# Altium PCB sensornode_poc_rtc.PcbDoc
Units mm, origin at the board's own origin, x right, y up, seen from the top; angles counter-clockwise.
Board outline 55 x 50 mm, 2 copper layers (Top Layer, Bottom Layer); 25 components, 28 nets, 102 pads, 18 vias.
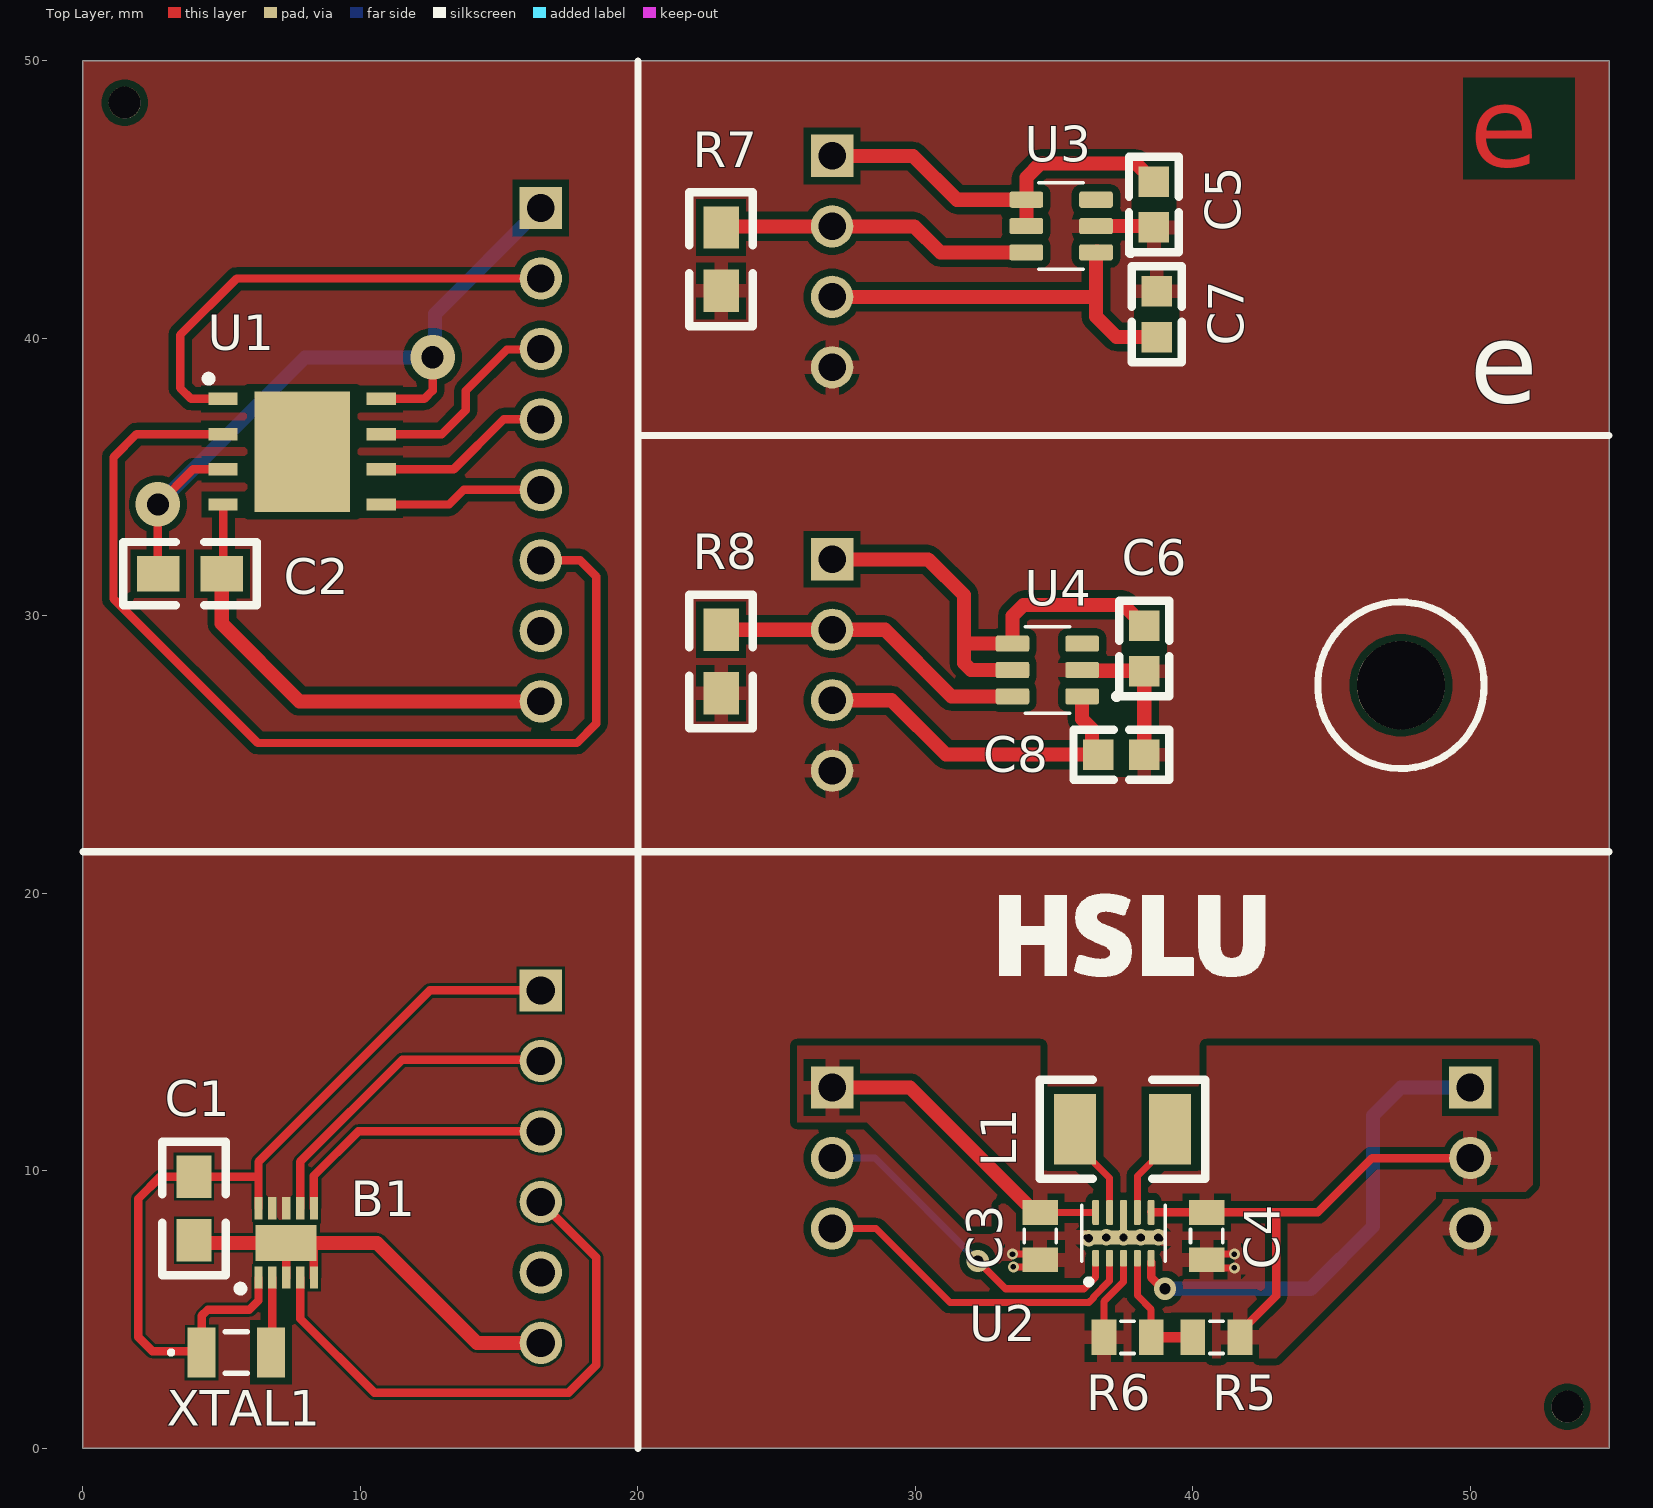
[diagram p0: Top Layer view]
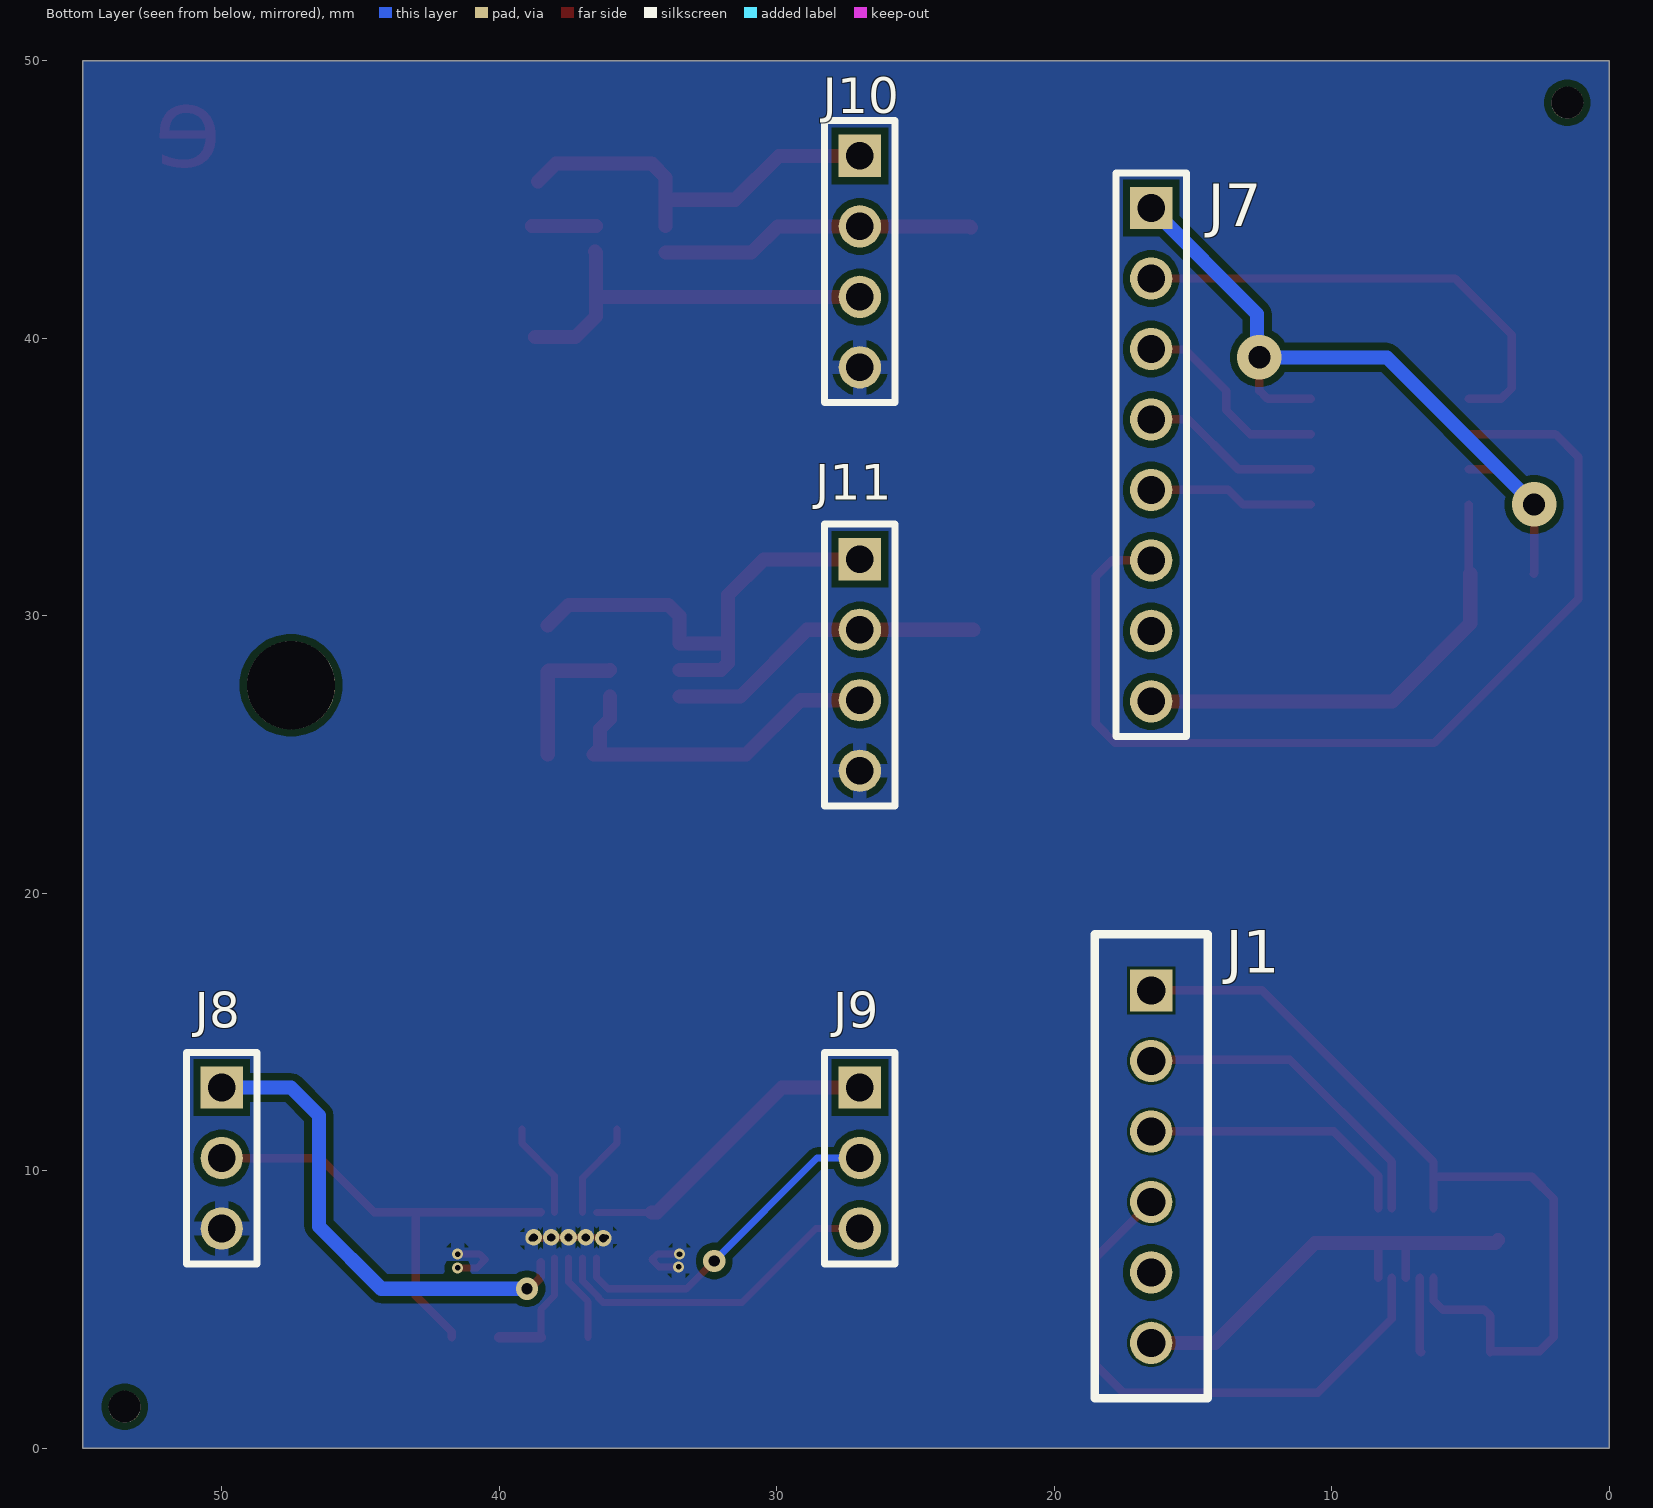
[diagram p1: Bottom Layer view, seen from below]

## Layer stack, top to bottom
Top Solder: solder mask 0.0102, Solder Resist, Dk 3.5
Top Layer: signal copper 0.0356
Dielectric 1: dielectric 0.32, FR-4, Dk 4.8
Bottom Layer: signal copper 0.0356
Bottom Solder: solder mask 0.0102, Solder Resist, Dk 3.5

## Board outline
0,50 0,0 55,0 55,50

## Design rules (kind name [scope] priority, off if disabled: settings)
Clearance Clearance_RTC_NET [All vs InNet('RTC_*')] p1: gap=0.1 ignorepadtopadclearanceinfootprint=FALSE
Clearance Clearance_VREG_NET [All vs InNet('RTC_*')] p2: gap=0.1 ignorepadtopadclearanceinfootprint=FALSE
Clearance Clearance_RTC [HasFootprint('SON50P260X260X50-11N')] p3: gap=0 ignorepadtopadclearanceinfootprint=FALSE
Clearance Clearance_VREG [HasFootprint('VREG_TPS63802DLAR')] p4: gap=0 ignorepadtopadclearanceinfootprint=FALSE
Clearance Clearance_jlcpcb [All] p5: gap=0.254 ignorepadtopadclearanceinfootprint=TRUE except(0.127: Arc-Arc Arc-Track Track-Track SMDPad-SMDPad; 0.33: Arc-THPad Track-THPad; 0.5: THPad-THPad) // https://jlcpcb.com/capabilities/pcb-capabilities
PlaneConnect [All] p1: planeconnectstyle=Relief reliefexpansion=0.508 reliefentries=4 reliefconductorwidth=0.508 reliefairgap=0.254
PolygonConnect [All] p1: connectstyle=Relief reliefconductorwidth=0.508 reliefentries=4 polygonreliefangle="90 Angle" airgapwidth=0.254
RoutingVias [All] p1: holewidth=0.711 width=1.27 viastyle="Through Hole" minholewidth=0.711 minwidth=1.27 maxholewidth=0.711 maxwidth=1.27
SolderMaskExpansion SolderMaskExpansion_Via [IsVia] p1: expansion=0.102 istentingtop=TRUE
SolderMaskExpansion [All] p2: expansion=0.102 istentingtop=FALSE
Width Width_jlcpcb [All] p1: maxlimit=1.27 minlimit=0.127 preferedwidth=0.254 minimp=50.000000 maximp=50.000000 favimp=50.000000
29 further rules are at their usual default settings.

## Classes and differential pairs
net class POWER: GND NetL1_1 NetL1_2 NetR5_2 V_EXT V_POWER_GOOD VCC1 VCC1_EN VCC1_MODE
component class power: C3 C4 C5 C6 C7 C8 J8 J9 J10 J11 L1 R5 R6 R7 R8 U2 U3 U4
component class sensornode_poc_rtc: B1 C1 C2 J1 J7 U1 XTAL1

## Components (designator, comment, footprint, x,y, rotation, side; value= is the part's Value field where it differs from the comment)
B1 "PCF85063ATL_1_118" SON50P260X260X50-11N 7.325,7.404 r90 top
C1 "0.1u" 0805 4,9.786 r270 top
C2 "0.1u" 0805 2.714,31.52 r0 top
C3 "Capacitor 0402" 0805_S 34.5,6.798 r90 top value=10uF
C4 "Capacitor 0402" 0805_S 40.5,6.798 r90 top value=22uF
C5 "Capacitor 0402" 0603 38.6,44 r90 top value=1µF
C6 "Capacitor 0402" 0603 38.25,28 r90 top value=1µF
C7 "Capacitor 0402" 0603 38.7,41.7 r270 top value=0.1uF
C8 "Capacitor 0402" 0603 38.25,25 r180 top value=0.1uF
J1 "CON6" CON_1x6_RM2.54_tht 16.5,16.5 r180 bottom
J7 "CON8" HEADER_8_RM_2.54 16.5,44.7 r180 bottom
J8 "CON3" HEADER_3_RM_2.54 50,13 r180 bottom
J9 "CON3" HEADER_3_RM_2.54 27,13 r180 bottom
J10 "CON4" HEADER_4_RM_2.54 27,46.58 r180 bottom
J11 "CON4" HEADER_4_RM_2.54 27,32.04 r180 bottom
L1 "0.47uH" 1210 35.75,11.5 r0 top
R5 "511k" 0805_S 41.702,4 r180 top
R6 "91k" 0805_S 38.5,4 r180 top
R7 "100k" 0805 23,44 r270 top
R8 "100k" 0805 23,29.5 r270 top
U1 "MEM_W25Q128FV" SON127P600X500X80-9N-D 7.9,35.92 r0 top
U2 "TPS63802DLAR" VREG_TPS63802DLAR 37.5,7.75 r90 top
U3 "TPS22860DBVR" SOT95P280X145-6N 35.255,44.05 r180 top
U4 "TPS22860DBVR" SOT95P280X145-6N 34.755,28.05 r180 top
XTAL1 "SC32S" SC32S7PF20PPM 5.525,3.454 r0 top

## Footprints (in the part's own frame and the unit in brackets; to place one, negate y for a bottom-side part, rotate by r counter-clockwise, add the part's x,y. Pads: shape width x height; smd on the part's side, far side on the other; paste and mask are expansions set on the pad)
0603 [mm]
  rect 1.1x1.1 smd: 1(0,0) 2(1.65,0)
  silkscreen extent -0.9,-0.9 2.55,0.9, body extent -0.45,-0.43 2.1,0.43, height 0.45
0805 [mil]
  rect 60x50 smd: 1(0,0) 2(90,0)
  silkscreen extent -50,-45 140,45, body extent 5,-25 85,25, height 51
0805_S [mil]
  rect 35x50 smd: 1(0,0) 2(67,0)
  silkscreen extent 24,-23 43,23, body extent -7,-25 74,25, height 44
1210 [mil]
  rect 60x100 smd: 1(0,0) 2(135,0)
  silkscreen extent -50,-70 185,70, body extent 4,-49 131,49, height 51
CON_1x6_RM2.54_tht [mil]
  rect 60x60 hole 40: 1(0,0)
  round 60 hole 40: 2(0,-100) 3(0,-200) 4(0,-300) 5(0,-400) 6(0,-500)
  silkscreen extent -80,-579 80,80
HEADER_3_RM_2.54 [mil] "Header 3 Pin 2.54mm"
  rect 60x60 hole 39.37: 1(0,0)
  round 60 hole 39.37: 2(0,-100) 3(0,-200)
  silkscreen extent -50,-250 50,50, body extent -50,-250 50,50, height 394
HEADER_4_RM_2.54 [mil] "Header 4 Pin 2.54mm"
  rect 60x60 hole 39.37: 1(0,0)
  round 60 hole 39.37: 2(0,-100) 3(-0.01,-200.01) 4(0,-300)
  silkscreen extent -50,-350 50,50, body extent -50,-350 50,50, height 394
HEADER_8_RM_2.54 [mil] "Header 8 Pin 2.54mm"
  rect 60x60 hole 39.37: 1(0,0)
  round 60 hole 39.37: 2(0,-100) 3(-0.01,-200.01) 4(0,-300) 5(0,-400) 6(0,-500) 7(0,-600) 8(0,-700)
  silkscreen extent -50,-750 50,50, body extent -50,-750 50,50, height 394
SC32S7PF20PPM [mm]
  rect 1x1.8 smd: 1(-1.25,0) 2(1.25,0)
  silkscreen extent -2.4,-0.75 0.4,0.75, body extent -1.65,-0.8 1.65,0.8, height 0.84
SON50P260X260X50-11N [mm]
  rect 0.8x0.3 smd: 1(-1.25,1) 2(-1.25,0.5) 3(-1.25,0) 4(-1.25,-0.5) 5(-1.25,-1) 6(1.25,-1) 7(1.25,-0.5) 8(1.25,0) 9(1.25,0.5) 10(1.25,1)
  rect 1.3x2.2 smd: 11(0,0)
  silkscreen extent -1.77,1.52 -1.53,1.77, body extent -1.25,-1.25 1.25,1.25, height 0.8
SON127P600X500X80-9N-D [mm]
  rect 1.05x0.45 smd: 1(-2.85,1.905) 2(-2.85,0.635) 3(-2.85,-0.635) 4(-2.85,-1.905) 5(2.85,-1.905) 6(2.85,-0.635) 7(2.85,0.635) 8(2.85,1.905)
  rect 3.45x4.35 smd: 9(0,0)
  silkscreen extent -3.5,2.51 -3.25,2.75, body extent -3.05,-2.5 3.05,2.5, height 0.8
SOT95P280X145-6N [mm]
  rrect25% 1.21x0.58 smd: 1(-1.255,0.95) 2(-1.255,0) 3(-1.255,-0.95) 4(1.255,-0.95) 5(1.255,0) 6(1.255,0.95)
  silkscreen extent -2.6,-1.56 0.8,1.56, body extent -1.35,-1.45 1.35,1.45, height 1.45
VREG_TPS63802DLAR [mm]
  rrect40% 0.6x0.25 smd mask+0: 1(-0.9,1) 2(-0.9,0.5) 3(-0.9,0) 4(-0.9,-0.5) 5(-0.9,-1)
  rrect40% 0.9x0.25 smd mask+0: 6(0.75,-1) 7(0.75,-0.5) 9(0.75,0.5) 10(0.75,1)
  rrect12% 0.5x3 smd paste-2 mask+0.05: 8(-0.15,0)
  rrect40% 1.3x0.25 smd paste-2 mask+0: 8(0.55,0)
  silkscreen extent -1.85,-1.5 1,1.5, body extent -1,-1.5 1,1.5, height 1

## Part data
B1: "NXP - PCF85063ATL/1,118 - REAL TIME CLOCK/CALENDAR, BINARY, HXSON", Manufacturer_Name=NXP, Manufacturer_Part_Number=PCF85063ATL/1,118, Mouser Part Number=771-PCF85063ATL1118, Datasheet Link=http://www.nxp.com/docs/en/data-sheet/PCF85063A.pdf, Geometry.Height=0.5mm, Mouser Price/Stock=https://www.mouser.co.uk/ProductDetail/NXP-Semiconductors/PCF85063ATL-1118?qs=fi7yB2oewZkLUjzuQ0vPOQ%3D%3D
C1 C2: library part C
C3 C4 C5 C6 C7 C8: library part C, Capacitor Type=Ceramic, Case/Package=0402, Manufacturer=TDK, Manufacturer Part Number=C1005X6S0J105K050BC, Max Operating Temperature=85°C, Min Operating Temperature=-55°C, Tolerance=10%, Voltage Rating=6.3V, Component Type=Capacitors, Mounting Technology=SM, Pins=2, RoHS Compliant=True
L1: library part L?, Supplier Part Number=81-1276AS-H-R47MP2, Supplier=Mouser, Supplier 1=Mouser, Supplier Part Number 1=81-1276AS-H-R47MP2
R5 R7 R8: library part R?, "Normaler Widerstand"
R6: library part R?, "Normaler Widerstand", Supplier Part Number=595-TPS63802DLAR, Supplier=Mouser
U1: library part MEMORY_W25Q128FV
U2: Package="WFDFN-10 Richtek", Check_prices=https://www.snapeda.com/parts/RT6150B-33GQW/Richtek+USA+Inc./view-part/?ref=eda, MF="Richtek USA", MP=RT6150B-33GQW, SnapEDA_Link=https://www.snapeda.com/parts/RT6150B-33GQW/Richtek+USA+Inc./view-part/?ref=snap
U3 U4: "0.73-?, 5-V, ultra-low leakage load switch 6-SOT-23 -40 to 85", Package="SOT-23-6 Texas Instruments", Supplier Part Number=595-TPS22860DBVR, Digi-Key_Part_Number=296-43982-1-ND, MF="Texas Instruments", MP=TPS22860DBVR, SnapEDA_Link=https://www.snapeda.com/parts/TPS22860DBVR/Texas%20Instruments/view-part/473340/?ref=snap, Supplier=Mouser, Supplier 1=Mouser, Supplier Part Number 1=595-TPS22860DBVR, Texas_Instruments-Purchase-URL=https://snapeda.com/shop?store=Texas+Instruments&id=473340
XTAL1: library part SC32S-7PF20PPM, "Oscillator SC32S-7PF20PPM", Manufacturer_Name="Seiko Semiconductors", Mouser Part Number=628-SC32S-7PF20PPM, Supplier Part Number=728-1074-1-ND, Datasheet Link=https://www.mouser.com/datasheet/2/360/file_PRODUCT_MASTER_50812_GRAPHIC03-542305.pdf, Manufacturer_Part_Number=SC32S-7PF20PPM, Mouser Price/Stock=https://www.mouser.co.uk/ProductDetail/Seiko-Semiconductors/SC32S-7PF20PPM?qs=3CPZD7qAgigZSR1ASVAS6w%3D%3D, Supplier=Digikey, Supplier 1=Digikey, Supplier Part Number 1=728-1074-1-ND

## Free pads (board coordinates)
  round 1.152 hole 1.152 unplated paste-2539.97 mask+0.148: 2(1.5,48.5) 2(53.5,1.5)
  round 3.175 hole 3.175: 3(47.5,27.5)

## Via types
v1: diameter 0.4, hole 0.2, Top Layer to Bottom Layer, tented both sides, 9 vias
v2: diameter 0.6, hole 0.3, Top Layer to Bottom Layer, tented both sides, 5 vias
v3: diameter 0.8, hole 0.4, Top Layer to Bottom Layer, tented both sides, 2 vias
v4: diameter 1.6, hole 0.8, Top Layer to Bottom Layer, tented both sides, 2 vias

## Nets (pads, with @x,y where several pads share a name; then routed paths per layer and width w, separated by ;. In a path a pad name is that pad's centre, name@x,y a point inside that pad or via, vN(x,y) a via of type N, cw(c..) or ccw(c..) an arc to the next point about the centre after c; other vN are vias at no path point)
GND: C3.1 C4.1 C5.1 C6.1 C7.1 C8.1 J8.3 J10.4 J11.4 R6.2 R7.2 R8.2 U2.3 U2.8 U3.2 U4.2 | length 17.8
  Top Layer w0.254: v1(33.5,7) 34.298,7 C3.1 34.238,6.536 33.56,6.536 33.548,6.524 v1(33.536,6.536) ; v1(36.15,7.6) v1(36.825,7.6) v1(37.5,7.6) 37.513,7.588 38.162,7.588 v1(38.175,7.575) 38.188,7.562 38.838,7.562 v1(38.85,7.55) ; R6.2 36.798,5.298 37.5,6 U2.3 ; v1(41.5,6.5) 40.798,6.5 C4.1 40.702,7 v1(41.5,7)
  Top Layer w0.508: U4.2 36.035,28.025 38.225,28.025 C6.1 C8.1 ; U3.2 C5.1@38.818,44.05
  other v2: 36.25,7.575 36.875,7.6 37.5,7.6 38.125,7.6 38.75,7.6
LS1_EN: J10.2 R7.1 U3.6 | length 11.4
  Top Layer w0.508: R7.1 23.04,44.04 J10.2 29.96,44.04 30.9,43.1 U3.6
LS1_VIN: C5.2 J10.1 U3.4 U3.5 | length 14.5
  Top Layer w0.508: J10.1 29.92,46.58 31.5,45 U3.4 ; U3.5 U3.4 ; C5.2 37.95,46.3 34.5,46.3 34,45.8 U3.4
LS2_EN: J11.2 R8.1 U4.6 | length 11.6
  Top Layer w0.508: R8.1@22.9,29.5 R8.1 J11.2 28.9,29.5 31.3,27.1 U4.6
LS2_VIN: C6.2 J11.1 U4.4 U4.5 | length 17.6
  Top Layer w0.508: J11.1 30.46,32.04 31.75,30.75 31.75,29 ; U4.5 32,28.05 31.75,28.3 31.75,29 ; C6.2 37.5,30.4 33.9,30.4 33.5,30 U4.4 31.75,29
Mem_CS: J7.2 U1.1 | length 17.5
  Top Layer w0.305: U1.1 5.045,37.82 3.9,37.82 3.5,38.22 3.5,40.12 5.54,42.16 J7.2
MEM_GND: C2.2 J7.8 U1.4 | length 17
  Top Layer w0.305: C2.2 5.05,31.57 U1.4
  Top Layer w0.508: C2.2 5,29.72 7.8,26.92 J7.8
MEM_VCC_3V3: C2.1 J7.1 U1.3 U1.8 | length 27.6
  Top Layer w0.305: C2.1 2.7,31.534 v4(2.7,34.02) 3.965,35.285 U1.3 ; U1.8 12.305,37.825 12.6,38.12 v4(12.6,39.32)
  Bottom Layer w0.508: v4(2.7,34.02) 8,39.32 v4(12.6,39.32) 12.682,39.402 12.682,40.882 J7.1
NetB1_2: B1.2 XTAL1.2 | length 2.7
  Top Layer w0.305: XTAL1.2 6.825,3.504 B1.2
NetL1_1: L1.1 U2.9 | length 3.5
  Top Layer w0.254: L1.1 35.75,10.992 37,9.742 U2.9
NetL1_2: L1.2 U2.7 | length 3.5
  Top Layer w0.254: U2.7 38,9.813 39.179,10.992 L1.2
NetR5_2: R5.2 R6.1 U2.4 | length 4.6
  Top Layer w0.254: U2.4 38,5.5 38.5,5 R6.1
  Top Layer w0.381: R6.1 R5.2
RTC_GND: B1.3 B1.5 B1.11 C1.2 J1.6 | length 16.5
  Top Layer w0.305: B1.3 B1.11 ; B1.5 B1.11@8.325,7.325
  Top Layer w0.508: C1.2 4.096,7.404 B1.11 10.596,7.404 14.2,3.8 J1.6
RTC_I2C0_SCL: B1.7 J1.2 | length 11.9
  Top Layer w0.305: B1.7 7.825,10.325 11.5,14 16.46,14 J1.2
RTC_I2C0_SDA: B1.6 J1.3 | length 10
  Top Layer w0.305: B1.6 8.325,9.825 9.92,11.42 J1.3
RTC_VCC_3V3: B1.1 B1.10 C1.1 J1.1 XTAL1.1 | length 30.9
  Top Layer w0.305: 6.286,9.786 C1.1 2.786,9.786 2,9 2,4 2.496,3.504 4.225,3.504 XTAL1.1 4.275,4.775 4.5,5 6,5 6.325,5.325 B1.1 ; B1.10 6.325,9.786 6.325,10.325 12.5,16.5 J1.1
RTC_WakeUp: B1.4 J1.4 | length 20.4
  Top Layer w0.305: B1.4 7.825,4.675 10.5,2 17.5,2 18.5,3 18.5,6.88 J1.4
SPI1_CSn: J7.3 U1.7 | length 7.4
  Top Layer w0.305: U1.7 12.935,36.555 13.8,37.42 13.8,38.12 15.281,39.601 16.481,39.601 J7.3
SPI1_RX: J7.6 U1.2 | length 36.8
  Top Layer w0.305: U1.2 1.935,36.555 1.1,35.72 1.1,30.62 6.3,25.42 17.8,25.42 18.5,26.12 18.5,31.42 17.92,32 J7.6
SPI1_SCK: J7.4 U1.6 | length 6.5
  Top Layer w0.305: U1.6 13.365,35.285 15.16,37.08 J7.4
SPI1_TX: J7.5 U1.5 | length 6
  Top Layer w0.305: U1.5 13.195,34.015 13.72,34.54 J7.5
V_EXT: C3.2 J9.1 U2.10 | length 11.4
  Top Layer w0.254: C3.2 U2.10
  Top Layer w0.508: J9.1 29.81,13 34.31,8.5 C3.2
V_POWER_GOOD: J8.1 U2.5 | length 17.6
  Top Layer w0.305: U2.5@38.5,6.702 38.5,6.157 38.907,5.75 v3(39,5.75)
  Bottom Layer w0.508: v3(39,5.75) 44.25,5.75 46.5,8 46.5,12 47.5,13 J8.1
VCC1: C4.2 J8.2 R5.1 U2.6 | length 17.3
  Top Layer w0.305: U2.6 C4.2 43,8.5 ; R5.1 41.702,4.19 43,5.489 43,8.5 ; J8.2 46.46,10.46 44.5,8.5 43,8.5
VCC1-1: C7.2 J10.3 U3.1 | length 14.4
  Top Layer w0.508: J10.3 36.51,41.5 ; U3.1@36.546,43.136 U3.1 36.51,41.5 ; C7.2 37.25,40.05 36.51,40.79 36.51,41.5
VCC1-2: C8.2 J11.3 U4.1 | length 12.8
  Top Layer w0.508: J11.3 29.14,26.96 31.1,25 C8.2 36.369,25.231 36.369,25.931 36.01,26.29 U4.1
VCC1_EN: J9.2 U2.1 | length 12.3
  Top Layer w0.254: v3(32.25,6.75) 33.25,5.75 36.081,5.75 36.5,6.169 U2.1
  Bottom Layer w0.254: J9.2 28.54,10.46 v3(32.25,6.75)
VCC1_MODE: J9.3 U2.2 | length 12.3
  Top Layer w0.254: J9.3 28.58,7.92 31.25,5.25 36.25,5.25 36.417,5.417 36.417,5.456 37,6.039 U2.2
pads on no net: B1.8 B1.9 J1.5 J7.7 U1.9 U3.3 U4.3

## Polygon pours and split planes (outlines as drawn)
GND on Top Layer "GND_L01_P009" (solid, pour order 9): 0,50 0,0 55,0 55,50
VCC1 on Top Layer "POWER_VCC" (solid, pour order 6): 38.25,9.25 39,10 40.5,10 40.5,14.5 52.25,14.5 52.25,9.5 52,9.25 48.75,9.25 48.75,9 43,3.25 38.25,3.25
V_EXT on Top Layer "POWER_VEXT" (solid, pour order 5): 36.5,9.25 35.75,10 34.5,10 34.5,14.5 25.75,14.5 25.75,11.75 28.25,11.75 32,8 36.5,8
GND on Top Layer "GND_POWER_SUPPLY" (solid, pour order 4): 33,8.754 42.25,8.754 42.25,5.75 42,5.75 33,5.75
GND on Bottom Layer "GND_L02_P000" (solid, pour order 0): 0,50 0,0 55,0 55,50

## Other copper
Top Layer:
  text "e" at 49.982,45.235 h5

## Silkscreen, mask and mechanical layers (free items; w line width, h text height)
Top Overlay:
  drawing of 8 lines, arcs and shapes, not listed
  text "e" at 49.982,36.735 h5
Top Solder:
  text "e" at 49.982,41.235 h5
Mechanical 1:
  lines w0.254: 0.1,20.1 0.1,50.1 20.1,50.1 ; 0.1,20.1 20.1,20.1 ; 0.1,20.1 0.1,0.1 20.1,0.1 ; 20.1,0.1 55,0.1 55,50.1 20.1,50.1 ; 20.1,0.1 20.1,20.1 ; 20.1,20.1 20.1,50.1